# Altium PCB Si4464_pcb.PcbDoc
Units mm, origin at the board's own origin, x right, y up, seen from the top; angles counter-clockwise.
Board outline 13.4 x 13.4 mm, 4 copper layers (Top Layer, Layer 1, Layer 2, Bottom Layer 1), stack 0.775 mm thick; 14 components, 12 nets, 42 pads, 56 vias.
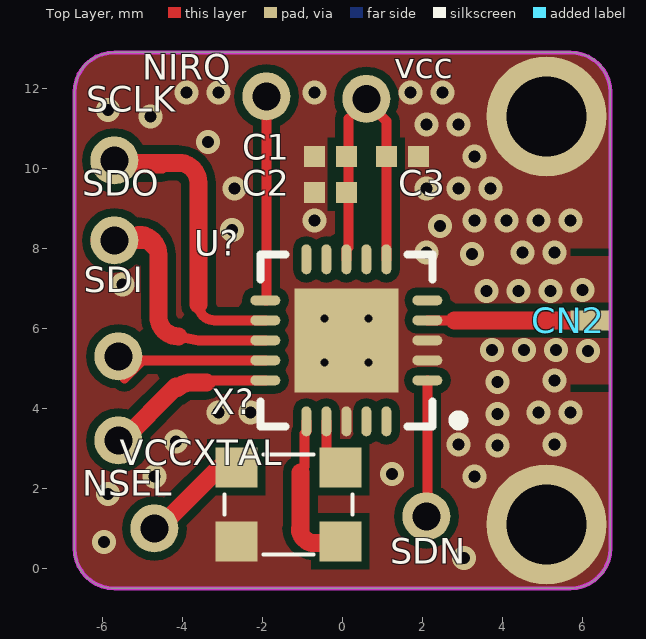
[diagram p0: Top Layer view]
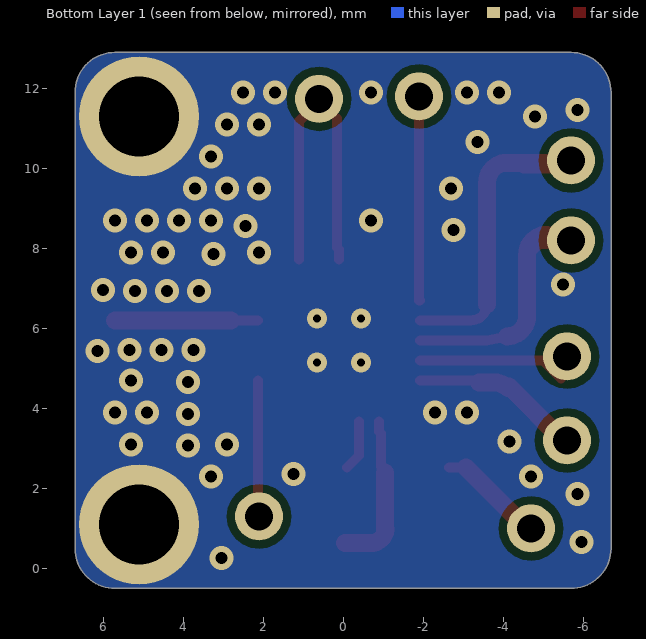
[diagram p1: Bottom Layer 1 view, seen from below]
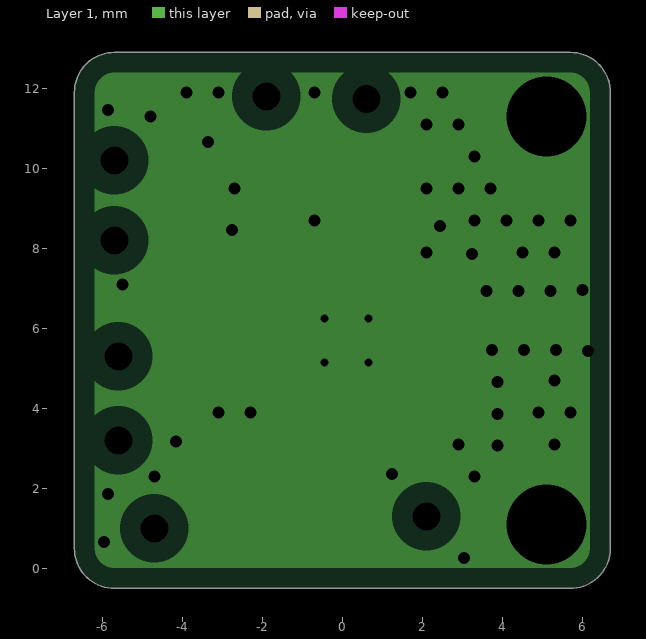
[diagram p2: Layer 1, clearances drawn from the general rule]
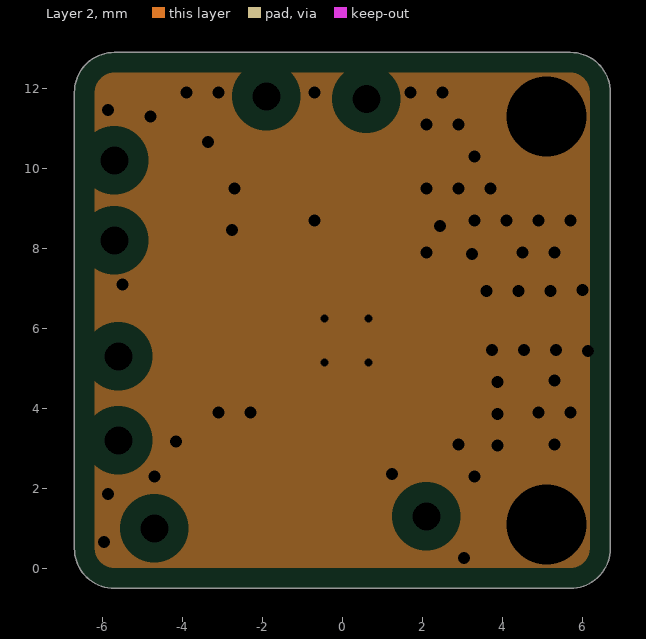
[diagram p3: Layer 2, clearances drawn from the general rule]

## Layer stack, top to bottom
Top Solder: solder mask 0.0102, Solder Resist, Dk 3.5
Top Layer: signal copper 0.035
Dielectric 2: prepreg 0.254, PP-006, Dk 4.1
Layer 1: plane copper 0.035, net GND
Dielectric 1: dielectric 0.127, FR-4, Dk 4.8
Layer 2: plane copper 0.035, net GND
Dielectric 3: prepreg 0.254, PP-006, Dk 4.1
Bottom Layer 1: signal copper 0.035
Bottom Solder: solder mask 0.0102, Solder Resist, Dk 3.5

## Board outline
-6.7,0.5 -6.7,11.9 cw(c-5.7,11.9) -5.7,12.9 5.7,12.9 cw(c5.7,11.9) 6.7,11.9 6.7,0.5 cw(c5.7,0.5) 5.7,-0.5 -5.7,-0.5 cw(c-5.7,0.5)

## Design rules (kind name [scope] priority, off if disabled: settings)
Clearance [All] p1: gap=0.2 ignorepadtopadclearanceinfootprint=FALSE
HoleSize [All] p1: absolutevalues=TRUE maxlimit=5 minlimit=0.3 maxpercent=80.000 minpercent=20.000
PlaneClearance [All] p1: clearance=0.508
PlaneConnect [All] p1: planeconnectstyle=Direct reliefexpansion=0.508 reliefentries=4 reliefconductorwidth=0.254 reliefairgap=0.254
PolygonConnect [All] p1: connectstyle=Direct reliefconductorwidth=0.254 reliefentries=4 polygonreliefangle="90 Angle" airgapwidth=0.254
RoutingVias [All] p1: holewidth=0.711 width=1.27 viastyle="Through Hole" minholewidth=0.711 minwidth=1.27 maxholewidth=0.711 maxwidth=1.27 useviatemplates=TRUE viatemplateguid#1={C9874F68-3A7B-4B19-8C88-4CFB5286B30C} viatemplatename#1=v60h30m0mx0
SolderMaskExpansion [All] p1: expansion=0.102
Width Width_50ohm [InNetClass('50ohm')] p1: maxlimit=0.45 minlimit=0.45 preferedwidth=0.45 impedanceprofiledriven=TRUE impedanceprofileid={D2B77361-9B7D-4BD5-B69E-70E315500705} impedanceprofilevalue=50.000000 minimp=50.000000 maximp=50.000000 favimp=50.000000 checkconnectedcopper=TRUE
Width [All] p2: maxlimit=5 minlimit=0.2 preferedwidth=0.2
27 further rules are at their usual default settings.

## Classes and differential pairs
net class 50ohm: NetCN2_1

## Components (designator, comment, footprint, x,y, rotation, side; value= is the part's Value field where it differs from the comment)
C1 "100nF" 0402-CAP -0.3,10.3 r180 top value=100n
C2 "100pF" 0402-CAP -0.3,9.4 r180 top value=100p
C3 "1uF" 0402-CAP 1.5,10.3 r0 top value=1u
CN2 "X-CONNECTOR" X-CONNECTOR-PCB 5.1,1.1 r180 top
NIRQ "TEST_VIA_RF" "New footprint 1" -1.9,11.8 r90 top
NSEL "TEST_VIA_RF" "New footprint 1" -5.6,3.2 r90 top
SCLK "TEST_VIA_RF" "New footprint 1" -5.7,10.2 r90 top
SDI "TEST_VIA_RF" "New footprint 1" -5.6,5.3 r0 top
SDN "TEST_VIA_RF" "New footprint 1" 2.1,1.3 r90 top
SDO "TEST_VIA_RF" "New footprint 1" -5.7,8.2 r90 top
U? "SI4464-B1B-FM" QFN-20-2600x2600TP_N 0.1,5.7 r180 top
vcc "TEST_VIA_RF" "New footprint 1" 0.6,11.739 r90 top
VCCXTAL "TEST_VIA_RF" "New footprint 1" -4.7,1 r90 top
X? "WT325CF0026.000000" XTAL-3.2x2.5-4P -1.35,1.6 r0 top

## Footprints (in the part's own frame and the unit in brackets; to place one, negate y for a bottom-side part, rotate by r counter-clockwise, add the part's x,y. Pads: shape width x height; smd on the part's side, far side on the other; paste and mask are expansions set on the pad)
0402-CAP [mm] "Chip Capacitor, Body 1.0x0.5mm, Height 0.6mm, IPC Medium Density"
  rect 0.52x0.52 smd: 1(-0.4,0) 2(0.4,0)
  body extent -0.55,-0.3 0.55,0.3, height 0.33
"New footprint 1" [mm]
  round 1.2 hole 0.7: 1(0,0)
QFN-20-2600x2600TP_N [mm] "QFN, 20-Leads, Body 4x4mm, Pitch 0.5mm, Thermal Pad 2.6x2.6mm, IPC Medium Density"
  oval 0.75x0.25 smd: 1(-2.025,1) 2(-2.025,0.5) 3(-2.025,0) 4(-2.025,-0.5) 5(-2.025,-1) 11(2.025,-1) 12(2.025,-0.5) 13(2.025,0) 14(2.025,0.5) 15(2.025,1)
  oval 0.25x0.75 smd: 6(-1,-2.025) 7(-0.5,-2.025) 8(0,-2.025) 9(0.5,-2.025) 10(1,-2.025) 16(1,2.025) 17(0.5,2.025) 18(0,2.025) 19(-0.5,2.025) 20(-1,2.025)
  rect 2.6x2.6 smd: 21(0,0)
  silkscreen extent -2.93,-2.15 2.15,2.15, body extent -2,-2 2,2, height 0.9
X-CONNECTOR-PCB [mm]
  rect 1x0.5 smd: 1(-1.1,-5.1)
  round 3 hole 2: M1(0,0) M2(0,-10.2)
  Top Layer pour cut-out: -1.616,-3.576
  Top Layer pour cut-out: -1.6,-3.5 -0.6,-3.5 -0.6,-3.3 -1.6,-3.3
  Top Layer pour cut-out: -0.6,-6.7 -1.6,-6.7 -1.6,-6.9 -0.6,-6.9
XTAL-3.2x2.5-4P [mm]
  rect 1.05x1 smd: 1(-1.3,-0.925) 2(1.3,-0.925) 3(1.3,0.925) 4(-1.3,0.925)
  silkscreen extent -1.6,-1.25 1.6,1.25, body extent -1.6,-1.25 1.6,1.25, height 1.2

## Part data
C1: library part CC0402-100nF-A.12, "CAP CER 0.1UF 10V 20% X5R 0402", Part No=VJ0402V104ZXQPBC, Cod EMS=05.281.006.133
C2: library part CC0402-100pF-A.2, "CAP CER 100PF 50V 1% NP0 0402", Part No=GRM1555C1H101FA01D, Cod EMS=05.281.019.520
C3: library part CC0402-1uF-5, "CAP CER 1UF 6.3V 10% X5R 0402", Part No=JMK105BJ105KV-F, Cod EMS=05.281.019.513
CN2: library part X-CONNECTOR-5, "CONECTOR PARA MÓDULOS X MICROWAVE", Mount=TH, RoHS=Yes
NIRQ NSEL SCLK SDI SDN SDO vcc VCCXTAL: library part TEST_VIA_RF-01.A.1, "Test VIA for RF circuits"
U?: library part SI4464-B1B-FM-1, "TXRX ISM EZ RADIO PRO 20QFN", Cod EMS=05.284.001.518, Part No=SI4464-B1B-FM
X?: library part WT325CF0026.000000-2, "OSC TCXO 26MHZ 2.8V SMD", Cod EMS=05.290.008.059, Part No=WT325CF0026.000000

## Via types
v1: diameter 0.6, hole 0.3, Top Layer to Bottom Layer 1, 30 vias
v2: diameter 0.6, hole 0.3, Top Layer to Bottom Layer 1, tented both sides, 22 vias
v3: diameter 0.5, hole 0.2, Top Layer to Bottom Layer 1, 4 vias

## Nets (pads, with @x,y where several pads share a name; then routed paths per layer and width w, separated by ;. In a path a pad name is that pad's centre, name@x,y a point inside that pad or via, vN(x,y) a via of type N, cw(c..) or ccw(c..) an arc to the next point about the centre after c; other vN are vias at no path point)
GND: C1.2 C2.2 C3.2 CN2.M1 CN2.M2 U?.2 U?.3 U?.18 U?.21 X?.1
  other v1: -4.7,2.3 3.3,2.3 2.9,3.1 5.3,3.1 -3.1,3.9 -2.3,3.9 4.9,3.9 5.7,3.9 5.3,4.7 -5.5,7.1 2.1,7.9 4.5,7.9 5.3,7.9 -0.7,8.7 3.3,8.7 4.1,8.7 4.9,8.7 5.7,8.7 -2.7,9.5 2.1,9.5 2.9,9.5 3.7,9.5 3.3,10.3 2.1,11.1 2.9,11.1 -3.9,11.9 -3.1,11.9 -0.7,11.9 1.7,11.9 2.5,11.9
  other v2: 3.035,0.261 -5.965,0.661 -5.865,1.861 1.235,2.361 3.875,3.065 -4.157,3.172 3.875,3.865 3.875,4.665 6.135,5.44 3.735,5.461 4.535,5.461 5.335,5.461 3.599,6.939 4.399,6.939 5.199,6.939 5.999,6.96 3.235,7.861 -2.765,8.461 2.435,8.561 -3.365,10.661 -4.8,11.3 -5.865,11.461
  other v3: -0.45,5.15 0.65,5.15 -0.45,6.25 0.65,6.25
NetC1_1: C1.1 C2.1 C3.1 U?.6 U?.8 vcc.1 | length 7.8
  Top Layer w0.25: U?.8 0.1,7.975 0.15,8.025 0.15,11.25 ; vcc.1@0.6,11.8 vcc.1 0.6,11.679 1.1,11.179 C3.1 U?.6
NetCN2_1: CN2.1 U?.4 | length 3.6
  Top Layer w0.25: U?.4 2.8,6.2
  Top Layer w0.45: 2.8,6.2 5.7,6.2
NetNIRQ_1: NIRQ.1 U?.11 | length 5.1
  Top Layer w0.25: U?.11 -1.9,6.7 NIRQ.1
NetNSEL_1: NSEL.1 U?.15 | length 4.2
  Top Layer w0.25: -3.4,4.7 U?.15
  Top Layer w0.45: NSEL.1 -5.5,3.2 -4.156,4.544 ; -4.119,4.508 cw(c-3.775,4.164) -3.775,4.65 -3.4,4.65
NetSCLK_1: SCLK.1 U?.12 | length 9.2
  Top Layer w0.25: SCLK.1@-5.7,10 -4.5,10 ; -3.6,6.6 ccw(c-3.2,6.6) -3.2,6.2 ; -2.6,6.2 -3.2,6.2 ; U?.12 -3.2,6.2
  Top Layer w0.45: SCLK.1@-5.76,10.14 -4.1,10.14 cw(c-4.1,9.64) -3.6,9.64 -3.6,6.6
NetSDI_1: SDI.1 U?.14 | length 3.7
  Top Layer w0.25: SDI.1@-5.45,4.75 -5,5.2 U?.14
NetSDN_1: SDN.1 U?.1 | length 3.4
  Top Layer w0.25: SDN.1 2.125,1.325 U?.1
NetSDO_1: SDO.1 U?.13 | length 9.2
  Top Layer w0.25: SDO.1 -5.671,8.171 -4.871,8.171 -4.911,8.211 ; -4.871,8.071 -4.6,7.8 -4.55,7.75 -4.55,6.35 ; -4.1,5.8 -3.6,5.7 U?.13
  Top Layer w0.45: SDO.1@-6.071,8.211 -4.911,8.211 ; -5.1,8.34 cw(c-5.1,7.84) -4.6,7.84 -4.6,7.8 -4.6,6.3 ccw(c-4.1,6.3) -4.1,5.8
NetU?_16: U?.16 X?.2 | length 4
  Top Layer w0.25: -1.1,2.4 -0.95,2.55 -0.95,3.375 -0.9,3.425 U?.16
  Top Layer w0.45: -1.065,1 ccw(c-0.7,1) -0.7,0.635 ; -1.05,1 -1.05,2.4 ; -0.735,0.635 -0.7,0.635 ; X?.2@-0.05,0.635 -0.7,0.635
NetU?_17: U?.17 X?.3 | length 1.3
  Top Layer w0.25: U?.17 -0.4,2.825 X?.3@-0.1,2.525
NetVCCXTAL_1: VCCXTAL.1 X?.4 | length 2.4
  Top Layer w0.25: X?.4@-3.075,2.525 X?.4
  Top Layer w0.45: VCCXTAL.1@-4.5,1.1 X?.4@-3.075,2.525
pads on no net: U?.5 U?.7 U?.9 U?.10 U?.19 U?.20

## Polygon pours and split planes (outlines as drawn)
GND on Bottom Layer 1 "Bottom Layer 1-GND" (solid, pour order 3): -5.7,-0.5 cw(c-5.7,0.5) -6.7,0.5 -6.7,11.9 cw(c-5.7,11.9) -5.7,12.9 5.7,12.9 cw(c5.7,11.9) 6.7,11.9 6.7,0.5 cw(c5.7,0.5) 5.7,-0.5
GND on Top Layer "Top Layer-GND" (solid, pour order 5): -5.7,-0.5 cw(c-5.7,0.5) -6.7,0.5 -6.7,11.9 cw(c-5.7,11.9) -5.7,12.9 5.7,12.9 cw(c5.7,11.9) 6.7,11.9 6.7,0.5 cw(c5.7,0.5) 5.7,-0.5
GND on Layer 1 (split plane): 5.796,12.382 5.888,12.354 5.973,12.309 6.048,12.248 6.109,12.173 6.154,12.088 6.182,11.996 6.191,11.912 6.19,11.9 6.19,0.5 6.191,0.488 6.182,0.404 6.154,0.312 6.109,0.227 6.048,0.152 5.973,0.091 5.888,0.046 5.796,0.018 5.712,0.009 5.7,0.01 -5.7,0.01 -5.712,0.009 -5.796,0.018 -5.888,0.046 -5.973,0.091 -6.048,0.152 -6.109,0.227 -6.154,0.312 -6.182,0.404 -6.191,0.488 -6.19,0.5 -6.19,11.9 -6.191,11.912 -6.182,11.996 -6.154,12.088 -6.109,12.173 -6.048,12.248 -5.973,12.309 -5.888,12.354 -5.796,12.382 -5.712,12.391 -5.7,12.39 5.7,12.39 5.712,12.391
GND on Layer 2 (split plane): 5.796,12.382 5.888,12.354 5.973,12.309 6.048,12.248 6.109,12.173 6.154,12.088 6.182,11.996 6.191,11.912 6.19,11.9 6.19,0.5 6.191,0.488 6.182,0.404 6.154,0.312 6.109,0.227 6.048,0.152 5.973,0.091 5.888,0.046 5.796,0.018 5.712,0.009 5.7,0.01 -5.7,0.01 -5.712,0.009 -5.796,0.018 -5.888,0.046 -5.973,0.091 -6.048,0.152 -6.109,0.227 -6.154,0.312 -6.182,0.404 -6.191,0.488 -6.19,0.5 -6.19,11.9 -6.191,11.912 -6.182,11.996 -6.154,12.088 -6.109,12.173 -6.048,12.248 -5.973,12.309 -5.888,12.354 -5.796,12.382 -5.712,12.391 -5.7,12.39 5.7,12.39 5.712,12.391

## Keep-outs
Top Layer:
  the board outline again, w0.1

## Silkscreen, mask and mechanical layers (free items; w line width, h text height)
Mechanical 1:
  the board outline again, w0.2